# Altium PCB PCB1.PcbDoc
Units mil, origin at the board's own origin, x right, y up, seen from the top; angles counter-clockwise.
Board outline 984.25 x 1968.5 mil, 2 copper layers (Top Layer, Bottom Layer); 36 components, 52 nets, 132 pads, 91 vias.
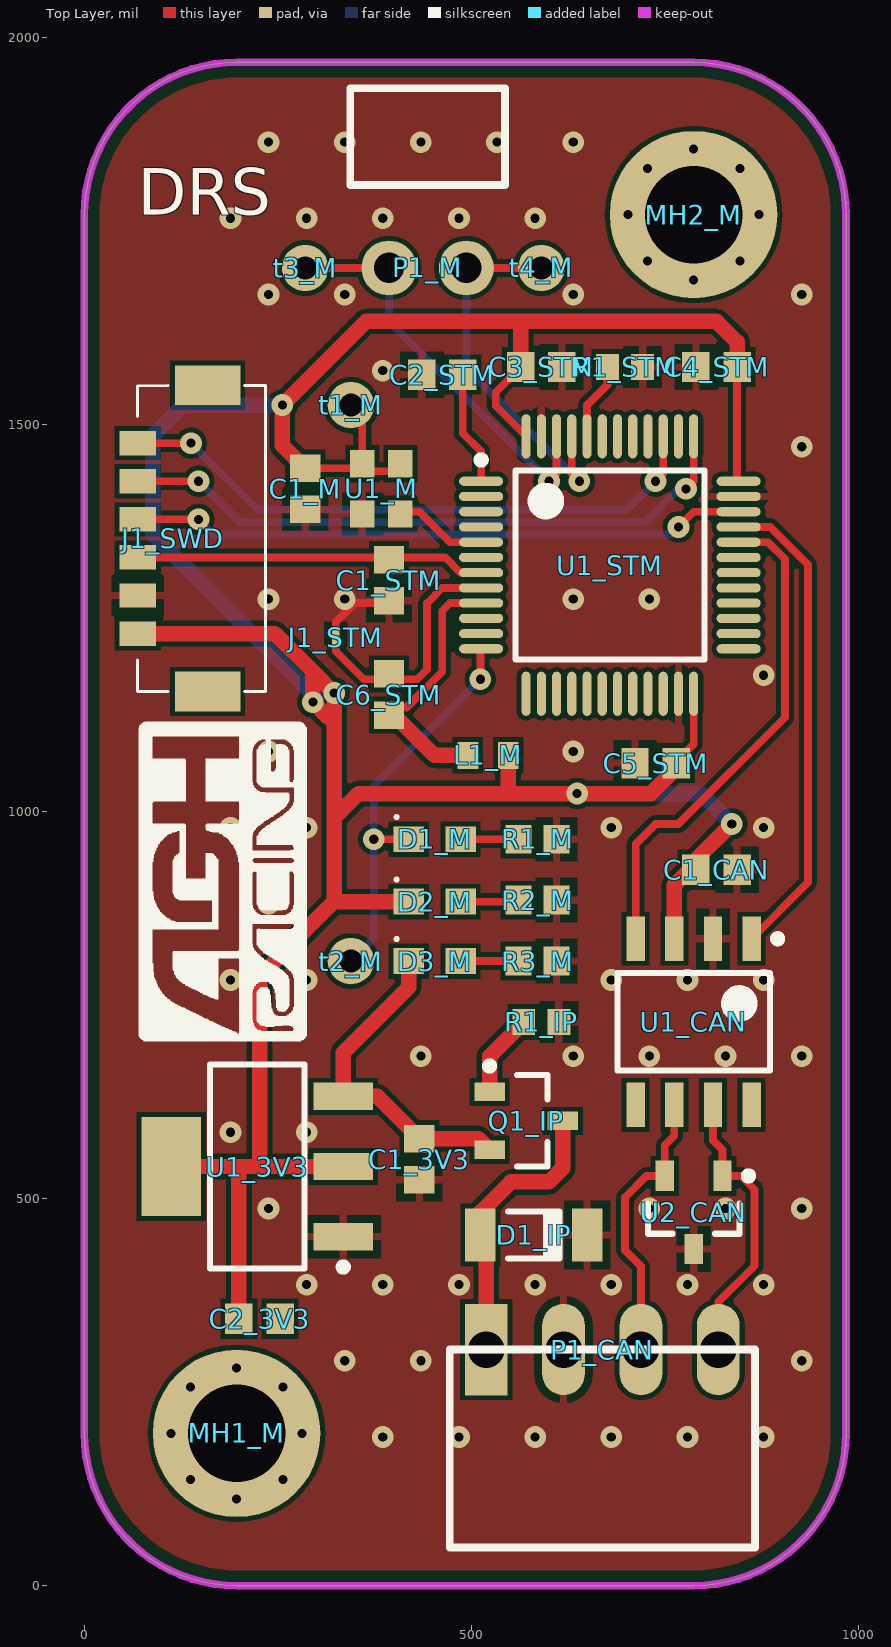
[diagram p0: Top Layer view]
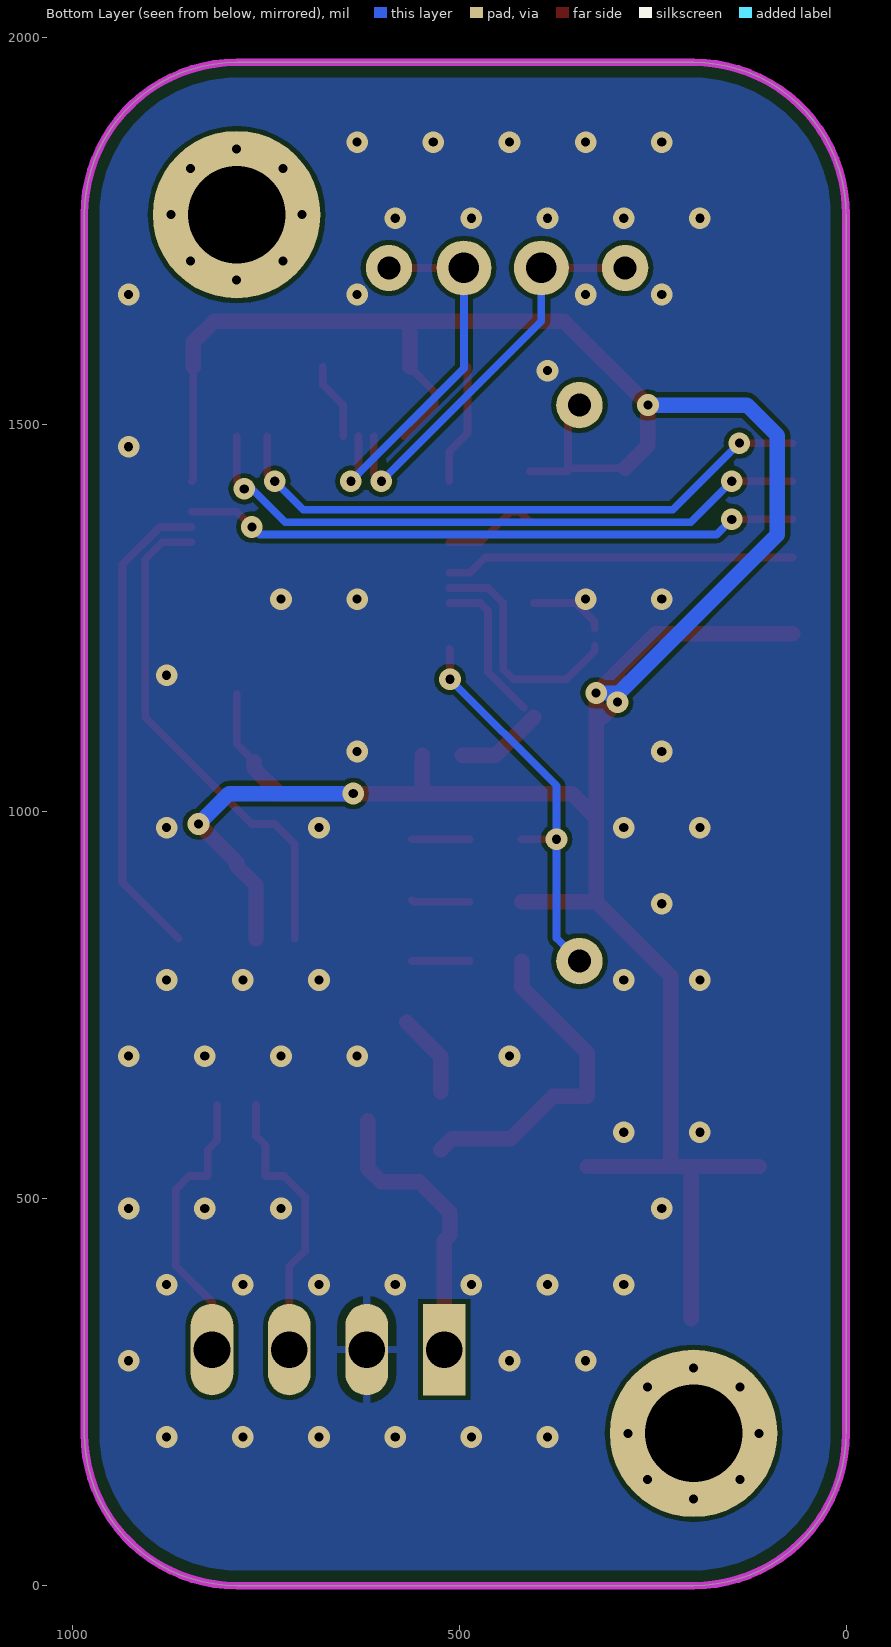
[diagram p1: Bottom Layer view, seen from below]
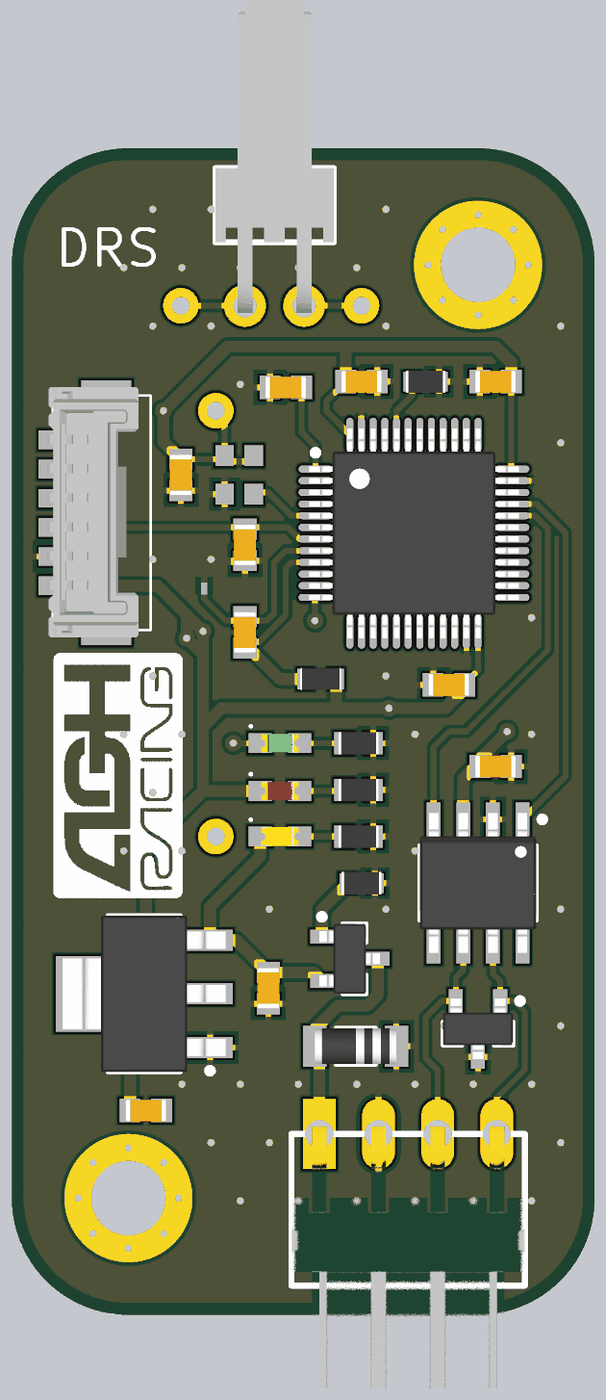
[diagram p2: 3D render of the assembled board from above, using the file's embedded part models]

## Layer stack, top to bottom
Top Solder: solder mask 0.4, Solder Resist, Dk 3.5
Top Layer: signal copper 1.4
Dielectric 1: dielectric 12.6, FR-4, Dk 4.8
Bottom Layer: signal copper 1.4
Bottom Solder: solder mask 0.4, Solder Resist, Dk 3.5

## Board outline
196.85,0 295.28,0 787.4,0 ccw(c787.4,196.85) 984.25,196.85 984.25,1771.65 ccw(c787.4,1771.65) 787.4,1968.5 688.98,1968.5 196.85,1968.5 ccw(c196.85,1771.65) 0,1771.65 0,196.85 ccw(c196.85,196.85)

## Design rules (kind name [scope] priority, off if disabled: settings)
BoardOutlineClearance [All] p1: gap=19.68 ignorepadtopadclearanceinfootprint=FALSE
Clearance [All] p1: gap=6 ignorepadtopadclearanceinfootprint=FALSE except(0: Arc-Hole Track-Hole SMDPad-Hole THPad-Hole Via-Hole Fill-Hole Poly-Hole Region-Hole Text-Hole)
HoleSize [All] p1: absolutevalues=TRUE maxlimit=248.03 minlimit=11.81 maxpercent=80.000 minpercent=20.000
MinimumAnnularRing [All] p1: minimumring=3
MinimumSolderMaskSliver [All] p1: minsoldermaskwidth=0
NetAntennae [All] p1: netantennaetolerance=3.94
PlaneConnect [Not IsVia] p1: planeconnectstyle=Relief reliefexpansion=20 reliefentries=4 reliefconductorwidth=10 reliefairgap=10
PlaneConnect PlaneConnect_via [IsVia] p2: planeconnectstyle=Direct reliefexpansion=20 reliefentries=4 reliefconductorwidth=10 reliefairgap=10
PolygonConnect PolygonConnect_via [All vs IsVia] p1: connectstyle=Direct reliefconductorwidth=10 reliefentries=4 polygonreliefangle="90 Angle" airgapwidth=10
PolygonConnect [All vs Not IsVia] p2: connectstyle=Relief reliefconductorwidth=10 reliefentries=4 polygonreliefangle="90 Angle" airgapwidth=10
RoutingVias [All] p1: holewidth=28 width=50 viastyle="Through Hole" minholewidth=3.94 minwidth=3.94 maxholewidth=28 maxwidth=50 useviatemplates=TRUE viatemplateguid#1={DDE690CC-3E8A-4089-9BA0-A73B3AABB6C4} viatemplateguid#2={658F4137-92F5-4DC9-85A3-574B144FED45} viatemplateguid#3={8EA034CB-1A96-461C-8F3A-6AF95A9737A9} viatemplateguid#4={4E5C3A69-E046-455E-9239-EB2E343A6271} viatemplateguid#5={48F45091-CC0B-4EB0-8820-261A0DF83610} viatemplatename#1=v51h25m0mx0 viatemplatename#2=v71h30m71 viatemplatename#3=v76h50 viatemplatename#4=v76h50m0mx0 viatemplatename#5=v97h70
SilkToSilkClearance [All] p1: silktosilkclearance=0
SilkToSolderMaskClearance [IsPad] p1: minsilkscreentomaskgap=0 clearancetoexposedcopper=FALSE
SolderMaskExpansion [All] p1: expansion=4
Width [All] p1: maxlimit=20 minlimit=6 preferedwidth=10
24 further rules are at their usual default settings.

## Classes and differential pairs
net class POWER: 3V3 GND VCC VCC_SAFE
net class PC[13..15]: PC13 PC14 PC15
net class PB[0..15]: PB0 PB1 PB2 PB4 PB5 PB6 PB7 PB8 PB9 PB10 PB11 PB12 PB13 PB14 PB15
net class PA[0..10]: PA0 PA1 PA2 PA3 PA4 PA5 PA6 PA7 PA8 PA9 PA10
component class U_SWD_programming: J1_SWD
component class U_STM32F303CCT6: C1_STM C2_STM C3_STM C4_STM C5_STM C6_STM J1_STM R1_STM U1_STM
component class "U_Input Protection": D1_IP Q1_IP R1_IP
component class "U_CAN Transceiver SN65HVD232D": C1_CAN P1_CAN U1_CAN U2_CAN
component class "U_3V3 LD1117S33TR": C1_3V3 C2_3V3 U1_3V3
component class Main: C1_M D1_M D2_M D3_M L1_M MH1_M MH2_M P1_M R1_M R2_M R3_M t1_M t2_M t3_M t4_M U1_M

## Components (designator, comment, footprint, x,y, rotation, side; value= is the part's Value field where it differs from the comment)
C1_3V3 "Cap" CAP_0603_IPC_MD 433.07,551.18 r90 top value=10uF
C1_CAN "Cap" CAP_0603_IPC_MD 816.93,925.2 r180 top value=100nF
C1_M "Cap" CAP_0603_IPC_MD 285.43,1417.32 r90 top value=100nF
C1_STM "Cap" CAP_0603_IPC_MD 393.7,1299.21 r90 top value=100nF
C2_3V3 "Cap" CAP_0603_IPC_MD 226.38,344.81 r180 top value=10uF
C2_STM "Cap" CAP_0603_IPC_MD 462.6,1564.96 r0 top value=100nF
C3_STM "Cap" CAP_0603_IPC_MD 590.55,1574.8 r180 top value=100nF
C4_STM "Cap" CAP_0603_IPC_MD 816.93,1574.8 r0 top value=100nF
C5_STM "Cap" CAP_0603_IPC_MD 738.19,1062.99 r0 top value=100nF
C6_STM "Cap" CAP_0603_IPC_MD 393.7,1151.57 r270 top value=100nF
D1_IP "TGL34-20CA" DIO_MELF_IPC_MD 580.71,453.07 r180 top
D1_M "LED GREEN" LED_0603_GREEN_IPC_MD 452.76,964.57 r0 top
D2_M "LED RED" LED_0603_RED_IPC_MD 452.76,883.86 r0 top
D3_M "LED YELLOW" LED_0603_YELLOW_IPC_MD 452.76,807.09 r0 top
J1_STM "NetTie" NETTIE 324.8,1225.47 r90 top net-tie
J1_SWD "#NAME?" MicroLock_6p_vert 139.76,1353.35 r270 top
L1_M "Ind" IND_0603_IPC_HD 521.65,1072.83 r180 top value=10uH
MH1_M "Mounting Hole 2mm" "MOUNTING HOLE 3mm" 196.85,196.85 r0 top
MH2_M "Mounting Hole 2mm" "MOUNTING HOLE 3mm" 787.4,1771.65 r0 top
P1_CAN "CAN" "signal 4 pin" 669.29,305.12 r90 top
P1_M "Header 2" MOLEX_2PIN 343.7,1702.76 r0 top
Q1_IP "ZXMP3A13FTA" SOT23_IPC_MD 570.87,600.71 r0 top
R1_IP "Res" RES_0603_IPC_HD 590.55,728.35 r0 top value=1k
R1_M "Res" RES_0603_IPC_MD 585.63,964.57 r180 top value=470
R1_STM "Res" RES_0603_IPC_HD 698.82,1574.8 r180 top value=10k
R2_M "Res" RES_0603_IPC_MD 585.63,885.83 r180 top value=470
R3_M "Res" RES_0603_IPC_MD 585.63,807.09 r180 top value=4.7k
t1_M "Test point" Via_Test_Point 344.49,1525.59 r270 top
t2_M "Test point" Via_Test_Point 344.49,807.09 r90 top
t3_M "Test point" Via_Test_Point 285.43,1702.76 r0 top
t4_M "Test point" Via_Test_Point 590.55,1702.76 r0 top
U1_3V3 "LD1117S33TR" SOT223_IPC_HD 223.43,541.66 r180 top
U1_CAN "SN65HVD232D" SOIC_8_IPC_MD 787.4,728.66 r270 top
U1_M "16.00M-IQXO-791" ICLCX18 383.86,1417.32 r270 top
U1_STM "STM32F303CCT6" LQFP48_IPC_MD 679.13,1318.9 r0 top
U2_CAN "ESDCAN02-2BWY" SOT23_IPC_MD 787.4,482.28 r270 top

## Footprints (in the part's own frame and the unit in brackets; to place one, negate y for a bottom-side part, rotate by r counter-clockwise, add the part's x,y. Pads: shape width x height; smd on the part's side, far side on the other; paste and mask are expansions set on the pad)
CAP_0603_IPC_MD [mm] "Chip Capacitor, 2-Leads, Body 1,60x0,80mm, IPC Medium Density"
  rect 0.9x1 smd: 1(-0.675,0) 2(0.675,0)
  body extent -0.87,-0.48 0.87,0.48, height 0.95
DIO_MELF_IPC_MD [mm] "MELF Diode, 2-Leads, Body 3.50x1.53mm, IPC MD"
  rect 1x1.75 smd: 1(-1.75,0) 2(1.75,0)
  silkscreen extent -0.85,-0.77 0.85,0.78, body extent -1.75,-0.76 1.75,0.76, height 1.53
ICLCX18 [mm]
  rect 0.9x0.8 smd: 1(-0.825,-0.625) 2(0.825,-0.625) 3(0.825,0.625) 4(-0.825,0.625)
  body extent -1.25,-1 1.25,1, height 0.8
IND_0603_IPC_HD [mm] "Chip Inductor, 2-Leads, Body 1.60x0.80mm, IPC High Density"
  rect 0.68x0.88 smd: 1(-0.66,0) 2(0.66,0)
  body extent -0.9,-0.48 0.9,0.48, height 0.95
LED_0603_GREEN_IPC_MD [mm] "Molded Diode, 2-Leads, Body 1,60x0,80mm, IPC Medium Density"
  rect 1x0.85 smd: 1(-0.85,0) 2(0.85,0)
  silkscreen extent -1.3,0.68 -1.2,0.77, body extent -0.8,-0.39 0.8,0.39, height 0.7
LED_0603_RED_IPC_MD [mm] "Molded Diode, 2-Leads, Body 1,60x0,80mm, IPC Medium Density"
  rect 1x0.85 smd: 1(-0.85,0) 2(0.85,0)
  silkscreen extent -1.3,0.68 -1.2,0.77, body extent -0.8,-0.39 0.8,0.39, height 0.7
LED_0603_YELLOW_IPC_MD [mm] "Molded Diode, 2-Leads, Body 1,60x0,80mm, IPC Medium Density"
  rect 1x0.85 smd: 1(-0.85,0) 2(0.85,0)
  silkscreen extent -1.3,0.68 -1.2,0.77, body extent -0.8,-0.39 0.8,0.39, height 0.7
LQFP48_IPC_MD [mm] "TSQFP, 48-Leads, Body 7.00x7.00mm, Pitch 0.50mm, IPC Medium Density"
  oval 1.45x0.3 smd: 1(-4.225,2.75) 2(-4.225,2.25) 3(-4.225,1.75) 4(-4.225,1.25) 5(-4.225,0.75) 6(-4.225,0.25) 7(-4.225,-0.25) 8(-4.225,-0.75) 9(-4.225,-1.25) 10(-4.225,-1.75) 11(-4.225,-2.25) 12(-4.225,-2.75) 25(4.225,-2.75) 26(4.225,-2.25) 27(4.225,-1.75) 28(4.225,-1.25) 29(4.225,-0.75) 30(4.225,-0.25) 31(4.225,0.25) 32(4.225,0.75) 33(4.225,1.25) 34(4.225,1.75) 35(4.225,2.25) 36(4.225,2.75)
  oval 0.3x1.45 smd: 13(-2.75,-4.225) 14(-2.25,-4.225) 15(-1.75,-4.225) 16(-1.25,-4.225) 17(-0.75,-4.225) 18(-0.25,-4.225) 19(0.25,-4.225) 20(0.75,-4.225) 21(1.25,-4.225) 22(1.75,-4.225) 23(2.25,-4.225) 24(2.75,-4.225) 37(2.75,4.225) 38(2.25,4.225) 39(1.75,4.225) 40(1.25,4.225) 41(0.75,4.225) 42(0.25,4.225) 43(-0.25,4.225) 44(-0.75,4.225) 45(-1.25,4.225) 46(-1.75,4.225) 47(-2.25,4.225) 48(-2.75,4.225)
  silkscreen extent -4.35,-3.1 3.1,3.57, body extent -4.5,-4.5 4.5,4.5, height 1.6
MicroLock_6p_vert [mm] "MOLEX Micro-Lock Plus 1.25mm 6pin Vertical"
  rect 0.8x1.2 smd: 1(3.125,-1.8) 2(1.875,-1.8) 3(0.625,-1.8) 4(-0.625,-1.8) 5(-1.875,-1.8) 6(-3.125,-1.8)
  rect 1.3x2.15 smd: 7(5.025,0.495) 8(-5.025,0.495)
  silkscreen extent -5.02,-1.8 5.02,2.4, body extent -5.4,-2.02 5.35,1.88, height 4.2
MOLEX_2PIN [mm] "MOLEX Connector, 2-pin"
  round 1.8 hole 1: 1(1.27,0) 2(3.81,0)
  silkscreen extent 0,2.72 5.08,5.9, body extent 0,-0.32 5.08,14.42, height 5.84
"MOUNTING HOLE 3mm" [mm]
  round 5.5 hole 3.2 paste+0 mask+0: MOUNTING(0,0)
NETTIE [mil]
  rect 10x10 smd paste+0 mask+0: 1(-5,0) 2(5,0)
RES_0603_IPC_HD [mm] "Chip Resistor, 2-Leads, Body 1,55x0,80mm, IPC High Density"
  rect 0.75x0.85 smd: 1(-0.575,0) 2(0.575,0)
  body extent -0.85,-0.48 0.85,0.48, height 0.55
RES_0603_IPC_MD [mm] "Chip Resistor, 2-Leads, Body 1,55x0,80mm, IPC Medium Density"
  rect 0.85x0.95 smd: 1(-0.625,0) 2(0.625,0)
  body extent -0.85,-0.48 0.85,0.48, height 0.55
"signal 4 pin" [mm] "con"
  rect 3x1.4 / inner rect 2.5x1.2 / far side rect 3x1.4 hole 1.2: 1(0,3.81)
  oval 3x1.4 / inner oval 2.5x1.2 / far side oval 3x1.4 hole 1.2: 2(0,1.27) 3(0,-1.27) 4(0,-3.81)
  silkscreen extent -6.5,-5.01 0,5.01, body extent -12.61,-5 0.32,5, height 6.38
SOIC_8_IPC_MD [mm] "SOIC, 8-Leads, Pitch 1,27mm, IPC Medium Density"
  rect 1.45x0.6 smd: 1(-2.725,1.905) 2(-2.725,0.635) 3(-2.725,-0.635) 4(-2.725,-1.905) 5(2.725,-1.905) 6(2.725,-0.635) 7(2.725,0.635) 8(2.725,1.905)
  silkscreen extent -2.85,-2.5 1.6,2.88, body extent -3,-2.5 3,2.5, height 1.75
SOT23_IPC_MD [mm] "SOT23, 3-Leads, Body 2.90x2.45mm, Pitch 0.95mm, IPC Medium Density"
  rect 1x0.6 smd: 1(-1.2,0.95) 2(-1.2,-0.95) 3(1.2,0)
  silkscreen extent -1.32,-1.5 0.7,1.92, body extent -1.3,-1.5 1.3,1.5, height 1.1
SOT223_IPC_HD [mm] "SOT223, 4-Leads, Body 6.50x7.00mm (avg), Pitch 2.30mm, IPC High Density"
  rect 1.95x0.9 smd: 1(-2.825,2.3) 2(-2.825,0) 3(-2.825,-2.3)
  rect 1.95x3.25 smd: 4(2.825,0)
  silkscreen extent -2.95,-3.35 1.55,3.42, body extent -3.5,-3.35 3.5,3.35, height 1.8
Via_Test_Point [mil]
  round 60 hole 30: 2(0,0)

## Part data
C1_3V3 C1_CAN C1_M C1_STM C2_3V3 C2_STM C3_STM C4_STM C5_STM C6_STM: "Capacitor"
D1_IP: "Transil"
J1_SWD: library part 5007, Manufacturer 1=MOLEX, Manufacturer Part Number 1=5055680681, Supplier Part Number 1=538-505568-0681, ComponentLink1Description=Documentation, ComponentLink1URL=https://eu.mouser.com/datasheet/2/276/5055680681_PCB_HEADERS-1569860.pdf, Part Number=5007, Supplier 1=Mouser, Supplier Unit Price 1=373
L1_M: "Inductor"
MH1_M MH2_M: library part "Mounting Hole"
P1_CAN: library part "Header 4", "Header, 4-Pin"
P1_M: "Header, 2-Pin"
Q1_IP: "P-mosfet"
R1_IP R1_M R1_STM R2_M R3_M: "Resistor"
t1_M t2_M t3_M t4_M: library part "Test Point"
U1_CAN: "3.3V CAN Transceiver with Standby Mode, 17 mA, -40 to 85 degC, 8-pin SOIC (D), Green (RoHS & no Sb/Br)", Manufacturer="Texas Instruments", Manufacturer Part Number=SN65HVD232D, Mounting Technology=SMD, Part Number=SN65HVD232D, Supplier=TME, Supplier Part Number=SN65HVD232D, Type=IC
U1_M: "Crystal Clock Oscillator", Manufacturer="IQD FREQUENCY PRODUCTS", MPN=LFSPXO066657CUTT, Name=16.00M-IQXO-791, SPN=16.00M-IQXO-791, Supplier=TME
U1_STM: "ARM Cortex-M4 32-bit MCU, 256 KB Flash, 40 KB Internal RAM, 37 I/Os, 48-pin LQFP, -40 to 85 degC, Tray", I/Os (High Current)=37, Operating Frequency(F) (Processor speed) (MHz)=72, Supplier Part Number 1=497-13318-ND, Supply Voltage(Vcc) min (V)=2, ComponentLink1Description="Manufacturer URL", ComponentLink1URL=http://www.st.com/web/en/home.html, ComponentLink2Description=Datasheet, ComponentLink2URL=http://www.st.com/st-web-ui/static/active/en/resource/technical/document/datasheet/DM00058181.pdf, ComponentLink3Description="Package Specification", ComponentLink3URL=http://www.st.com/st-web-ui/static/active/en/resource/technical/document/datasheet/DM00058181.pdf, Core="ARM Cortex-M4", D/A Converter="2x12-bit (2 Channel)", DatasheetVersion="Rev. 6", FLASH Size (Prog) (kB)=256, Internal RAM Size (kB)=40, Mounting Technology="Surface Mount", PackageDescription="48-Pin Low Profile Quad Flat Package, 7 x 7 mm Body, 0.5 mm Pitch", PackageReference=LQFP48, PackageVersion="Rev. 6, 06/2013", Packing=Tray, PartNumber=STM32F303CCT6, Supplier 1=Digi-Key, Supplier 2=Newark, Supplier 3=Newark, Supplier 4=Mouser, Supplier Part Number 2=46W2192, Supplier Part Number 3=66W7286, Supplier Part Number 4=511-STM32F303CCT6
U2_CAN: "ESD CAN protection (2 transils)"

## Via types
v1: diameter 27.99, hole 11.81, Top Layer to Bottom Layer, tented both sides, 60 vias
v2: diameter 28, hole 11.81, Top Layer to Bottom Layer, 31 vias

## Nets (pads, with @x,y where several pads share a name; then routed paths per layer and width w, separated by ;. In a path a pad name is that pad's centre, name@x,y a point inside that pad or via, vN(x,y) a via of type N, cw(c..) or ccw(c..) an arc to the next point about the centre after c; other vN are vias at no path point)
3V3: C1_CAN.2 C1_M.2 C2_3V3.2 C3_STM.2 C4_STM.2 C5_STM.2 D2_M.1 J1_SWD.1 L1_M.1 t1_M.2 U1_3V3.2 U1_3V3.4 U1_CAN.3 U1_M.1 U1_M.4 U1_STM.24 U1_STM.36 U1_STM.48 | length 4507.2
  Top Layer w10: C1_M.2 355.31,1443.9 U1_M.1@359.25,1439.96 ; t1_M.2 359.25,1510.83 U1_M.1@359.25,1439.96 ; U1_M.4@408.46,1439.96 U1_M.1@359.25,1439.96 ; C3_STM.2 531.5,1542.32 531.5,1524.61 U1_STM.48 ; C5_STM.2@764.76,1064.96 787.4,1087.6 U1_STM.24 ; C4_STM.2 843.5,1429.13 U1_STM.36
  Top Layer w20: J1_SWD.1 246.06,1230.32 295.28,1181.1 ; U1_3V3.4 196.85,541.66 ; C2_3V3.2 199.8,538.7 196.85,541.66 ; C1_M.2 255.91,1473.43 v2(255.91,1525.59) 364.17,1633.86 561.02,1633.86 563.98,1633.86 ; U1_3V3.2 226.38,541.66 ; D2_M.1 322.83,883.86 ; L1_M.1 547.64,1029.92 541.34,1023.62 ; C3_STM.2 563.98,1633.86 ; U1_CAN.3 762.4,905.2 787.4,930.2 787.4,935.04 v2(836.61,984.25) ; C5_STM.2@764.76,1064.96 C5_STM.2 764.76,1056.11 732.27,1023.62 v2(636.81,1023.62) 541.34,1023.62 ; C4_STM.2 843.5,1607.28 816.93,1633.86 563.98,1633.86 ; 196.85,541.66 226.38,541.66 ; 226.38,541.66 226.38,787.4 322.83,883.86 ; 295.28,1181.1 v2(322.83,1153.54) 322.83,1122.05 ; 295.28,1181.1 v2(295.28,1141.73) 314.96,1122.05 322.83,1122.05 ; 322.83,883.86 322.83,992.13 ; 322.83,992.13 322.83,1122.05 ; 322.83,992.13 354.33,1023.62 541.34,1023.62
  Bottom Layer w20: v2(255.91,1525.59) 127.95,1525.59 88.58,1486.22 88.58,1358.27 v2@293.31,1153.54 ; v2(295.28,1141.73) 295.28,1151.57 v2@293.31,1153.54 ; v2(322.83,1153.54) v2@293.31,1153.54 ; v2(636.81,1023.62) 797.24,1023.62 v2(836.61,984.25)
AGND: C6_STM.1 J1_STM.1 U1_STM.8 | length 309
  Top Layer w10: 324.8,1214.47 324.8,1207.68 361.22,1171.26 430.13,1171.26 442.91,1184.04 442.91,1269.69 462.6,1289.37 U1_STM.8
CAN_RX: U1_CAN.4 U1_STM.32 | length 656.9
  Top Layer w10: U1_CAN.4 712.4,958.46 738.19,984.25 767.72,984.25 905.51,1122.05 905.51,1326.45 883.53,1348.43 U1_STM.32
CAN_TX: U1_CAN.1 U1_STM.33 | length 623.4
  Top Layer w10: U1_STM.33 886.47,1368.11 935.04,1319.55 935.04,908.59 U1_CAN.1
CANH: P1_CAN.4 U1_CAN.7 U2_CAN.1 | length 391.5
  Top Layer w10: U1_CAN.7 812.4,575.39 824.8,562.99 U2_CAN.1 848.43,529.53 866.14,511.81 866.14,413.39 819.29,366.54 P1_CAN.4@819.29,285.43
CANL: P1_CAN.3 U1_CAN.6 U2_CAN.2 | length 384.6
  Top Layer w10: P1_CAN.3@719.29,285.43 719.29,412.6 698.82,433.07 698.82,501.97 726.38,529.53 U2_CAN.2 750,568.9 762.4,581.3 U1_CAN.6
GND: C1_3V3.1 C1_CAN.1 C1_M.1 C1_STM.1 C2_STM.1 C3_STM.1 C4_STM.1 C5_STM.1 D1_IP.1 J1_STM.2 J1_SWD.2 P1_CAN.2 R1_IP.2 R1_M.1 R1_STM.1 R2_M.1 R3_M.1 U1_3V3.1 U1_CAN.2 U1_M.2 U1_STM.23 U1_STM.35 U1_STM.47 U2_CAN.3 | length 97.6
  Top Layer w10: 324.8,1236.47 324.8,1245.26 349.23,1269.69 C1_STM.1@403.54,1269.69
  other v1: 385.71,192.17 484.13,192.17 582.56,192.17 680.98,192.17 779.41,192.17 877.83,192.17 336.5,290.59 434.92,290.59 927.05,290.59 287.28,389.02 385.71,389.02 484.13,389.02 582.56,389.02 680.98,389.02 779.41,389.02 877.83,389.02 238.07,487.44 730.2,487.44 828.62,487.44 927.05,487.44 188.86,585.87 287.28,585.87 434.92,684.29 631.77,684.29 730.2,684.29 828.62,684.29 927.05,684.29 188.86,782.72 287.28,782.72 680.98,782.72 779.41,782.72 877.83,782.72 238.07,881.14 188.86,979.57 287.28,979.57 680.98,979.57 877.83,979.57 238.07,1077.99 631.77,1077.99 877.83,1176.42 238.07,1274.84 336.5,1274.84 631.77,1274.84 730.2,1274.84 927.05,1471.69 385.71,1570.12 238.07,1668.54 336.5,1668.54 631.77,1668.54 927.05,1668.54 188.86,1766.97 287.28,1766.97 385.71,1766.97 484.13,1766.97 582.56,1766.97 238.07,1865.39 336.5,1865.39 434.92,1865.39 533.35,1865.39 631.77,1865.39
NetD1_M_2: D1_M.2 R1_M.2 | length 74.8
  Top Layer w10: D1_M.2 R1_M.2
NetD2_M_2: D2_M.2 R2_M.2 | length 75.6
  Top Layer w10: D2_M.2 559.06,883.86 R2_M.2
NetD3_M_2: D3_M.2 R3_M.2 | length 74.8
  Top Layer w10: D3_M.2 R3_M.2
NetQ1_IP_1: Q1_IP.1 R1_IP.1 | length 108.6
  Top Layer w20: Q1_IP.1 523.62,684.06 R1_IP.1
NetR1_STM_2: R1_STM.2 U1_STM.44 | length 100.6
  Top Layer w10: U1_STM.44 649.61,1525.59 676.18,1552.17 R1_STM.2
NRST: C1_STM.2 J1_SWD.3 U1_STM.7 | length 452.1
  Top Layer w10: J1_SWD.3 466.25,1328.74 485.93,1309.06 U1_STM.7
OSC_IN: U1_M.3 U1_STM.5 | length 125.9
  Top Layer w10: U1_M.3@408.46,1375 421.26,1387.8 433.07,1387.8 472.44,1348.43 U1_STM.5
OSC_OUT: U1_STM.6
PA0: U1_STM.10
PA1: U1_STM.11
PA2: D1_M.1 t2_M.2 U1_STM.12 | length 518.5
  Top Layer w10: v2(374.02,964.57) D1_M.1 ; v2(511.81,1171.26) 511.81,1209.65 U1_STM.12
  Bottom Layer w10: t2_M.2 374.02,836.61 v2(374.02,964.57) 374.02,1033.46 v2(511.81,1171.26)
PA3: U1_STM.13
PA4: U1_STM.14
PA5: U1_STM.15
PA6: U1_STM.16
PA7: U1_STM.17
PA8: U1_STM.29
PA9: U1_STM.30
PA10: U1_STM.31
PA_15: U1_STM.38
PB0: U1_STM.18
PB1: U1_STM.19
PB2: U1_STM.20
PB4: U1_STM.40
PB5: U1_STM.41
PB6: U1_STM.42
PB7: U1_STM.43
PB8: P1_M.2 t4_M.2 U1_STM.45 | length 495.1
  Top Layer w10: P1_M.2 t4_M.2 ; U1_STM.45 629.92,1437.01 v2(639.76,1427.17)
  Bottom Layer w10: P1_M.2 493.7,1573.23 v2(639.76,1427.17)
PB9: P1_M.1 t3_M.2 U1_STM.46 | length 531.6
  Top Layer w10: t3_M.2 P1_M.1 ; v2(600.39,1427.17) 610.24,1437.01 U1_STM.46
  Bottom Layer w10: P1_M.1 393.7,1633.86 v2(600.39,1427.17)
PB10: U1_STM.21
PB11: U1_STM.22
PB12: U1_STM.25
PB13: U1_STM.26
PB14: U1_STM.27
PB15: U1_STM.28
PC13: U1_STM.2
PC14: U1_STM.3
PC15: U1_STM.4
SWCLK: J1_SWD.5 U1_STM.37 | length 820.4
  Top Layer w10: J1_SWD.5 v2(147.64,1427.17) ; v2(777.56,1417.32) 787.4,1427.17 U1_STM.37
  Bottom Layer w10: v2(147.64,1427.17) 200.54,1374.27 724.66,1374.27 767.72,1417.32 v2(777.56,1417.32)
SWD.SWDIO: J1_SWD.4 U1_STM.34 | length 797
  Top Layer w10: J1_SWD.4 v2(147.64,1377.95) ; v2(767.72,1368.11) 787.4,1387.8 U1_STM.34
  Bottom Layer w10: v2(147.64,1377.95) 167.32,1358.27 757.87,1358.27 v2(767.72,1368.11)
SWD.SWO: J1_SWD.6 U1_STM.39 | length 782.4
  Top Layer w10: J1_SWD.6 v2(137.8,1476.38) ; v2(738.19,1427.17) 748.03,1437.01 U1_STM.39
  Bottom Layer w10: v2(137.8,1476.38) 223.91,1390.27 701.29,1390.27 v2(738.19,1427.17)
VBAT: C2_STM.2 U1_STM.1 | length 157.4
  Top Layer w10: C2_STM.2@489.17,1574.8 489.17,1489.17 512.8,1465.55 U1_STM.1
VCC: D1_IP.2 P1_CAN.1 Q1_IP.3 | length 391.2
  Top Layer w20: P1_CAN.1@519.29,285.43 519.29,445.59 D1_IP.2 511.81,482.28 551.18,521.65 600.39,521.65 618.11,539.37 Q1_IP.3
VCC_SAFE: C1_3V3.2 D3_M.1 Q1_IP.2 U1_3V3.3 | length 427.5
  Top Layer w20: D3_M.1 419.29,773.62 334.65,688.98 U1_3V3.3 378.62,632.21 C1_3V3.2 509.18,577.76 Q1_IP.2
VDDA: C6_STM.2 L1_M.2 U1_STM.9 | length 310.9
  Top Layer w10: 416.34,1134.84 462.6,1181.1 462.6,1259.84 472.44,1269.68 U1_STM.9
  Top Layer w20: C6_STM.2@403.54,1122.05 452.76,1072.83 L1_M.2
pads on no net: C2_3V3.1 J1_SWD.7 J1_SWD.8 MH1_M.MOUNTING MH2_M.MOUNTING U1_CAN.5 U1_CAN.8
copper on no net:
  other v2: 196.85,112.2 137,137 256.7,137 112.2,196.85 281.5,196.85 137,256.7 256.7,256.7 196.85,281.5 787.4,1687.01 727.55,1711.8 847.26,1711.8 702.76,1771.65 872.05,1771.65 727.55,1831.51 847.26,1831.51 787.4,1856.3

## Polygon pours and split planes (outlines as drawn)
GND on Top Layer "Top Layer-GND" (solid, pour order 0): 0,1968.5 984.25,1968.5 984.25,0 974.41,-9.84 0,-9.84
GND on Bottom Layer "Bottom Layer-GND" (solid, pour order 2): 0,1968.5 984.25,1968.5 984.25,0 974.41,-9.84 0,-9.84

## Keep-outs
Keep-Out Layer:
  lines w10: 295.28,0 196.85,0 cw(c196.85,196.85) 0,196.85 0,1771.65 cw(c196.85,1771.65) 196.85,1968.5 688.98,1968.5 ; 295.28,0 295.28,0 ; 295.28,0 639.76,0 787.4,0 ccw(c787.4,196.85) 984.25,196.85 984.25,1771.65 ccw(c787.4,1771.65) 787.4,1968.5 ; 688.98,1968.5 787.4,1968.5 ; 688.98,1968.5 688.98,1968.5 ; 787.4,1968.5 787.4,1968.5

## Silkscreen, mask and mechanical layers (free items; w line width, h text height)
Top Overlay:
  drawing of 1214 lines, arcs and shapes, not listed
  text "DRS" at 68.9,1771.65 h60

## Dimensions
688.98,1968.5 to 639.76,0 on Mechanical 1
0,196.85 to 984.25,196.85 on Mechanical 1